# Altium PCB Pcb_4layer_8x4_Template_NoCenterHoles.PcbDoc
Units mil, origin at the board's own origin, x right, y up, seen from the top; angles counter-clockwise.
Board outline 8100 x 4000 mil, 4 copper layers (Top Layer, Middle 1 Layer, Middle 2 Layer, Bottom Layer), stack 51.864 mil thick; 97 components, 58 nets, 336 pads, 4 vias.
Unrouted connection lines stored in the file: 219.
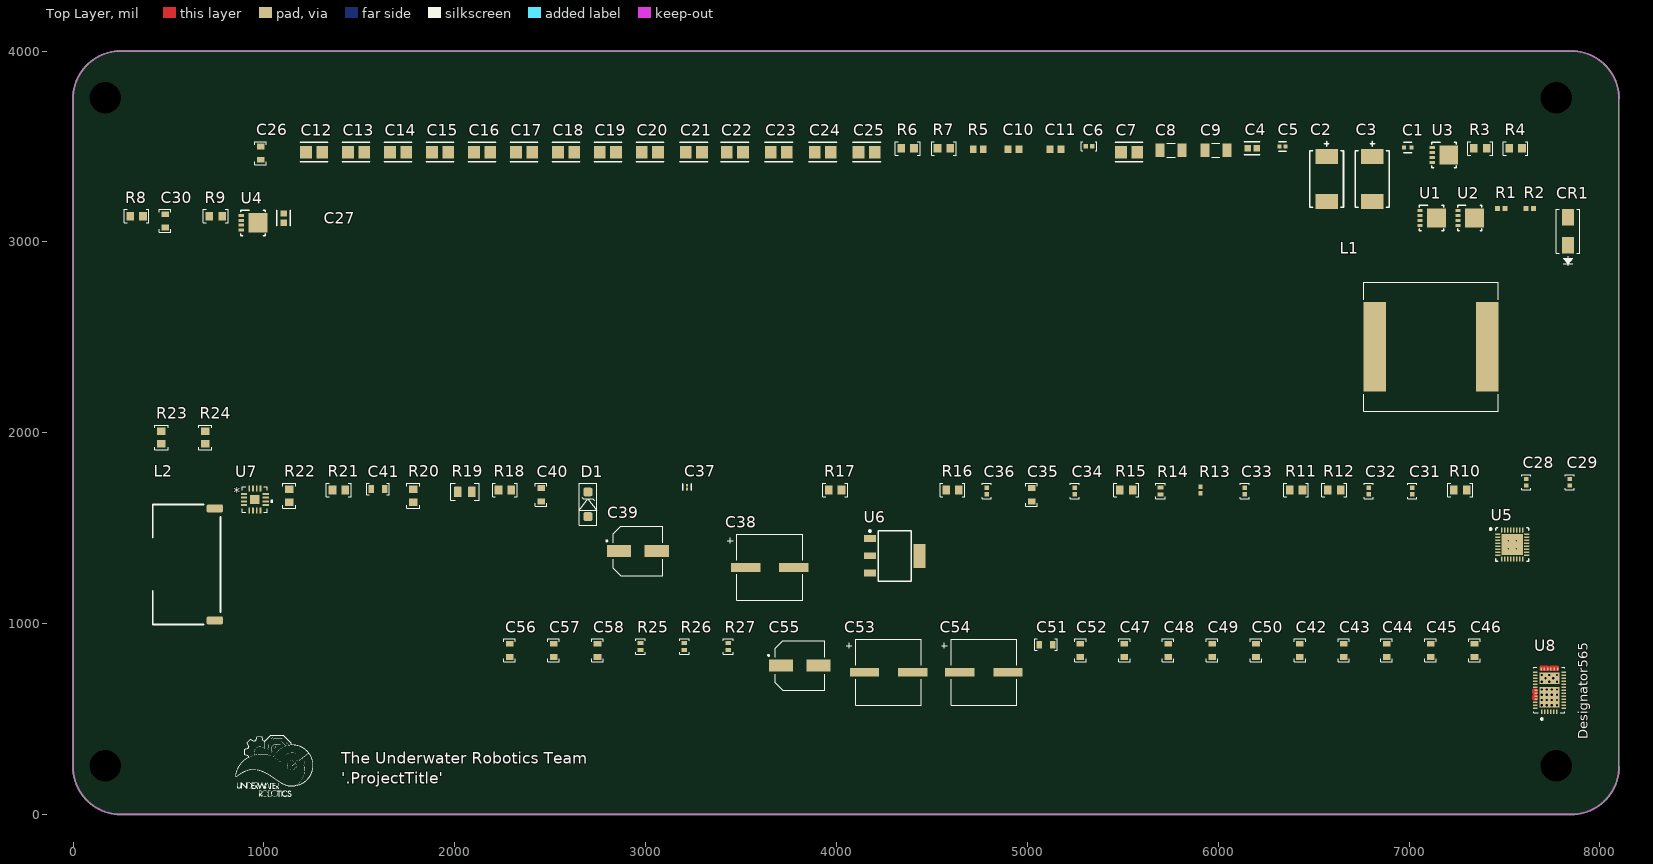
[diagram p0: Top Layer view]
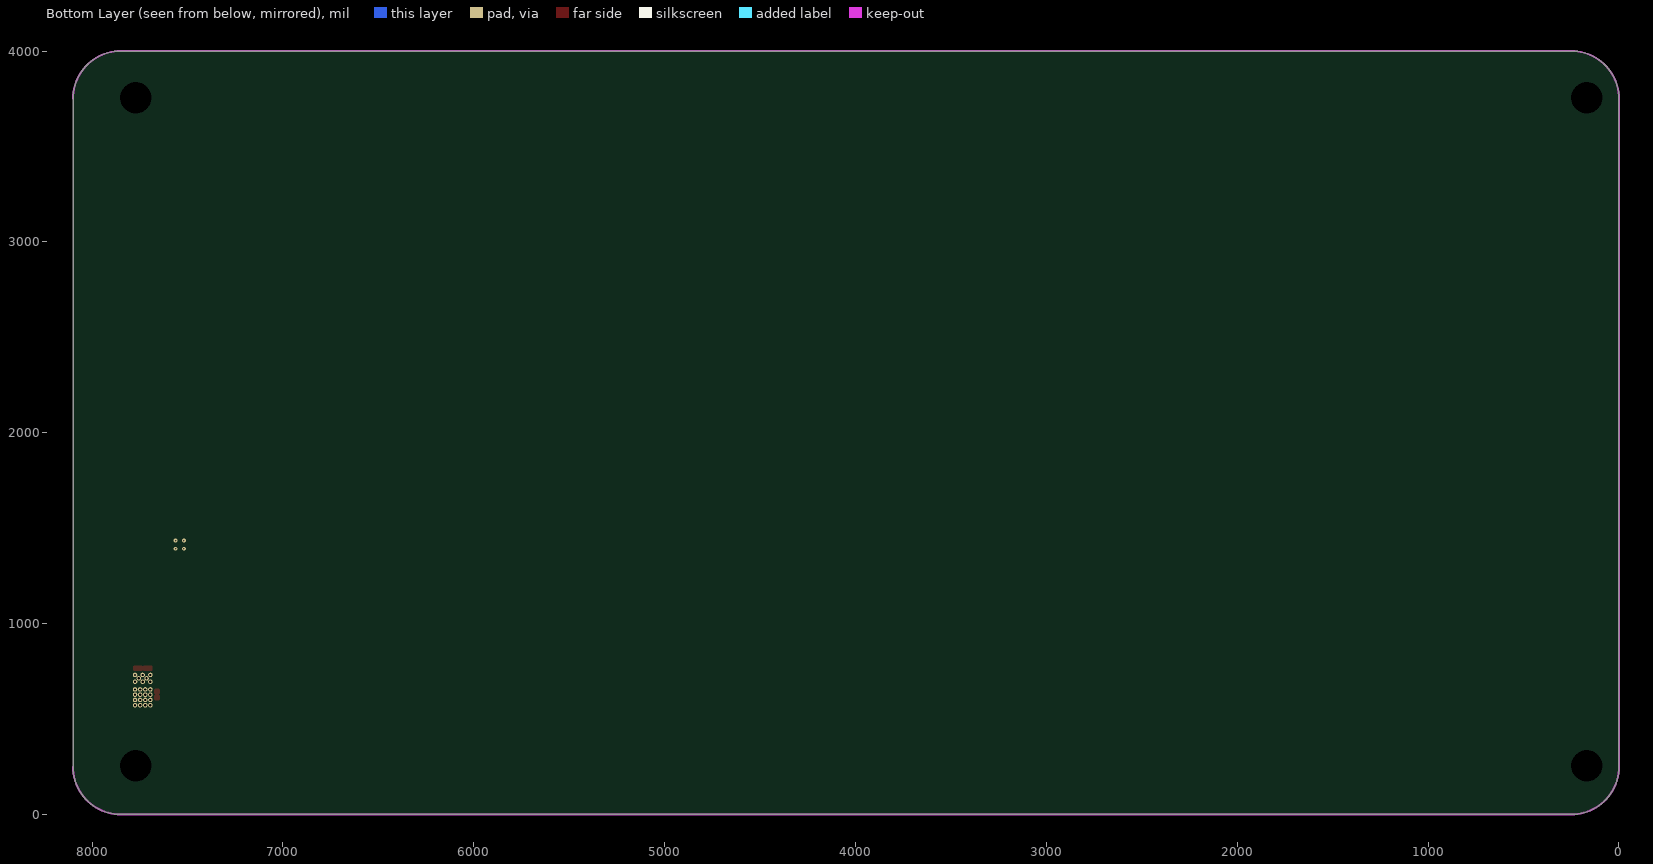
[diagram p1: Bottom Layer view, seen from below]

## Layer stack, top to bottom
Top Solder: solder mask 1, SM-001, Dk 4
Top Layer: signal copper 1.378
Dielectric 1: prepreg 5.1, PP-017, Dk 4.3
Dielectric 2: prepreg 5.1, PP-017, Dk 4.3
Middle 1 Layer: signal copper 0.354
Dielectric 3: core 28, Core-039, Dk 4.8
Middle 2 Layer: signal copper 0.354
Dielectric 4: prepreg 5.1, PP-017, Dk 4.3
Dielectric 5: prepreg 5.1, PP-017, Dk 4.3
Bottom Layer: signal copper 1.378
Bottom Solder: solder mask 1, SM-001, Dk 4

## Board outline
250,0 cw(c250,250) 0,250 0,3750 cw(c250,3750) 250,4000 7850,4000 cw(c7850,3750) 8100,3750 8100,250 cw(c7850,250) 7850,0

## Design rules (kind name [scope] priority, off if disabled: settings)
Clearance [All] p1: gap=10 ignorepadtopadclearanceinfootprint=FALSE except(0: Arc-Hole Track-Hole SMDPad-Hole THPad-Hole Via-Hole Fill-Hole Poly-Hole Region-Hole Text-Hole)
PolygonConnect [All] p1: connectstyle=Relief reliefconductorwidth=10 reliefentries=4 polygonreliefangle="90 Angle" airgapwidth=10
RoutingVias [All] p1: holewidth=28 width=50 viastyle="Through Hole" minholewidth=28 minwidth=50 maxholewidth=28 maxwidth=50
SolderMaskExpansion [All] p1: expansion=4 istentingtop=FALSE
Width [All] p1: maxlimit=10 minlimit=10 preferedwidth=10
30 further rules are at their usual default settings.

## Classes and differential pairs
component class SBH_Charger_Main: C1 C2 C3 C4 C5 C6 C7 C8 C9 C10 C11 C12 C13 C14 C15 C16 C17 C18 C19 C20 C21 C22 C23 C24 C25 C26 C27 C28 C29 C30 C31 C32 C33 C34 C35 C36 C37 C38 C39 C40 C41 CR1 D1 L1 L2 R1 R2 R3 R4 R5 R6 R7 R8 R9 R10 R11 R12 R13 R14 R15 R16 R17 R18 R19 R20 R21 R22 R23 R24 U1 U2 U3 U4 U5 U6 U7
component class Designator: C42 C43 C44 C45 C46 C47 C48 C49 C50 C51 C52 C53 C54 C55 C56 C57 C58 R25 R26 R27 U8

## Components (designator, comment, footprint, x,y, rotation, side; value= is the part's Value field where it differs from the comment)
C1 "10nF" FP-CC0402-MFG 6993,3495 r0 top value="10 nF"
C2 "22uF" FP-TAJD-MFG 6568,3330 r90 top
C3 "22uF" FP-TAJD-MFG 6808,3330 r90 top
C4 "1uF" FP-0603-L_1_6_0_15-W_0_8-IPC_C 6178,3490 r0 top
C5 "1nF" FP-C0402-BB-MFG 6338,3500 r0 top value="1,000 pF"
C6 "2.2uF Ceramic 35V" CAPACITOR_0402 5323,3500 r0 top value=2.2uF
C7 "10uF" FP-C3216-160-0_2-IPC_C 5533,3470 r0 top
C8 "10uF Ceramic 25V" CAPACITOR_1206 5753,3480 r0 top
C9 "10uF Ceramic 25V" CAPACITOR_1206 5988,3480 r0 top
C10 "47nF" CAPC1608X90X35ML10T15 4928,3485 r0 top
C11 "47nF" CAPC1608X90X35ML10T15 5148,3485 r0 top
C12 "10uF" FP-C3216-160-0_2-IPC_C 1263,3470 r0 top
C13 "10uF" FP-C3216-160-0_2-IPC_C 1483,3470 r0 top
C14 "10uF" FP-C3216-160-0_2-IPC_C 1703,3470 r0 top
C15 "10uF" FP-C3216-160-0_2-IPC_C 1923,3470 r0 top
C16 "10uF" FP-C3216-160-0_2-IPC_C 2143,3470 r0 top
C17 "10uF" FP-C3216-160-0_2-IPC_C 2363,3470 r0 top
C18 "10uF" FP-C3216-160-0_2-IPC_C 2583,3470 r0 top
C19 "10uF" FP-C3216-160-0_2-IPC_C 2803,3470 r0 top
C20 "10uF" FP-C3216-160-0_2-IPC_C 3023,3470 r0 top
C21 "10uF" FP-C3216-160-0_2-IPC_C 3253,3470 r0 top
C22 "10uF" FP-C3216-160-0_2-IPC_C 3468,3470 r0 top
C23 "10uF" FP-C3216-160-0_2-IPC_C 3698,3470 r0 top
C24 "10uF" FP-C3216-160-0_2-IPC_C 3928,3470 r0 top
C25 "10uF" FP-C3216-160-0_2-IPC_C 4158,3470 r0 top
C26 "100nF Ceramic 6.3V" CAPACITOR_0603 983,3465 r90 top value=0.1uF
C27 "1uF" FP-0603-L_1_6_0_15-W_0_8-IPC_C 1103,3125 r90 top
C28 "22nF Ceramic 25V" CAPACITOR_0402 7613,1740 r90 top value=22nF
C29 "22nF Ceramic 25V" CAPACITOR_0402 7843,1740 r90 top value=22nF
C30 "1uF Ceramic 16V" CAPACITOR_0603 483,3110 r90 top value=1uF
C31 "15pF Ceramic 50V" CAPACITOR_0402 7018,1695 r90 top value=15pF
C32 "1200pF Ceramic 50V" CAPACITOR_0402 6788,1695 r90 top value=1200pF
C33 "3.3nF Ceramic 50V" CAPACITOR_0402 6138,1695 r90 top value=3.3nF
C34 "33pF Ceramic 50V" CAPACITOR_0402 5248,1695 r90 top value=33pF
C35 "1uF Ceramic 16V" CAPACITOR_0603 5023,1675 r90 top value=1uF
C36 "2.2uF Ceramic 35V" CAPACITOR_0402 4788,1695 r90 top value=2.2uF
C37 "GRM033R6YA104ME14D" FP-GRM033-0_03-IPC_C 3218,1715 r90 top
C38 "22uF electrolytic 35 V" PCAP_8x5.4-ELECT_NCA 3650,1295 r0 top value=22uF
C39 "10uF electrolytic 63V" CAP_EEHZC1J100P 2960,1380 r0 top value=10uF
C40 "100pF Ceramic 50V" CAPACITOR_0603 2453,1675 r90 top value=100pF
C41 "100pF Ceramic 50V" CAPACITOR_0603 1598,1705 r0 top value=100pF
C42 "4.7uF Ceramic 6.3V" CAPACITOR_0603 6428,860 r90 top value=4.7uF
C43 "10nF Ceramic 6.3V" CAPACITOR_0603 6658,860 r90 top value=0.01uF
C44 "10nF Ceramic 6.3V" CAPACITOR_0603 6883,860 r90 top value=0.01uF
C45 "10nF Ceramic 6.3V" CAPACITOR_0603 7113,860 r90 top value=0.01uF
C46 "10nF Ceramic 6.3V" CAPACITOR_0603 7343,860 r90 top value=0.01uF
C47 "100uF Ceramic 6.3V" CAPACITOR_0603 5508,860 r90 top
C48 "100uF Ceramic 6.3V" CAPACITOR_0603 5738,860 r90 top
C49 "100uF Ceramic 6.3V" CAPACITOR_0603 5968,860 r90 top
C50 "10uF Ceramic 6.3V" CAPACITOR_0603 6198,860 r90 top
C51 "330pF Ceramic 16V" CAPACITOR_0603 5098,890 r0 top value=330pF
C52 "330pF Ceramic 16V" CAPACITOR_0603 5278,860 r90 top value=330pF
C53 "22uF electrolytic 35 V" PCAP_8x5.4-ELECT_NCA 4273,745 r0 top value=22uF
C54 "22uF electrolytic 35 V" PCAP_8x5.4-ELECT_NCA 4773,745 r0 top value=22uF
C55 "10uF electrolytic 63V" CAP_EEHZC1J100P 3808,780 r0 top value=10uF
C56 "10uF Ceramic 6.3V" CAPACITOR_0603 2288,860 r90 top
C57 "10uF Ceramic 6.3V" CAPACITOR_0603 2518,860 r90 top
C58 "10uF Ceramic 6.3V" CAPACITOR_0603 2748,860 r90 top
CR1 "SMAJP4KE18A-TP" DO-214AC 7833,3055 r90 top
D1 "Zener_Diode_36V_500mW" SOD-123 2698,1625 r90 top
L1 "SRP1770TA-3R3M" INDUCTOR_SRP1770TA-3R3M_BRN 7115,2450 r0 top
L2 "SPEAKER_SP_1609S" SPEAKER_SP-1609S 418,995 r0 top
R1 "2Ω" RESC1005X40X25ML05T05 7483,3175 r0 top
R2 "1Ω" RESC1005X40X25ML05T05 7633,3175 r0 top
R3 "0.005 OHM 1% 1W" RESISTOR_0603 7373,3490 r0 top
R4 "0.005 OHM 1% 1W" RESISTOR_0603 7558,3490 r0 top
R5 "2.2Ω" RESC1609X50X30ML10T20 4743,3485 r0 top
R6 "4.7 Ohm 5% 1/8W" RESISTOR_0603 4373,3490 r0 top
R7 "4.7 Ohm 5% 1/8W" RESISTOR_0603 4563,3490 r0 top
R8 "27 Ohm 5% 1/8W" RESISTOR_0603 333,3135 r0 top
R9 "27 Ohm 5% 1/8W" RESISTOR_0603 748,3135 r0 top
R10 "100k Ohm 5% 1/8W" RESISTOR_0603 7268,1700 r0 top
R11 "15k Ohm 5% 1/10W" RESISTOR_0603 6408,1700 r0 top
R12 "1k Ohm 5% 1/8W" RESISTOR_0603 6608,1700 r0 top
R13 "10 Ohm" RESC1005X40X25NL05T10 5908,1700 r90 top
R14 "16.9k Ohm 1% 1/16W" RESISTOR_0402 5698,1695 r90 top
R15 "470k Ohm 5% 1/10W" RESISTOR_0603 5518,1700 r0 top
R16 "270k Ohm 1% 1/10W" RESISTOR_0603 4608,1700 r0 top
R17 "100k Ohm 5% 1/8W" RESISTOR_0603 3993,1700 r0 top
R18 "100k Ohm 5% 1/8W" RESISTOR_0603 2263,1700 r0 top
R19 "33k Ohm 5% 1/8W" RESISTOR_0805 2053,1690 r0 top
R20 "169K OHM 1% 1/3W" RESISTOR_0603 1783,1670 r90 top
R21 "10k Ohm 5% 1/10W" RESISTOR_0603 1393,1700 r0 top
R22 "10k Ohm 5% 1/10W" RESISTOR_0603 1133,1670 r90 top
R23 "10k Ohm 5% 1/10W" RESISTOR_0603 463,1975 r90 top
R24 "10k Ohm 5% 1/10W" RESISTOR_0603 693,1975 r90 top
R25 "2.2k Ohm 1% 1/16W" RESISTOR_0402 2973,880 r90 top
R26 "2.2k Ohm 1% 1/16W" RESISTOR_0402 3203,880 r90 top
R27 "10k Ohm 1% 1/16W" RESISTOR_0402 3433,880 r90 top
U1 "G30N03D3" DNH0008A_NV 7118,3125 r0 top
U2 "G30N03D3" DNH0008A_NV 7318,3125 r0 top
U3 "G30N03D3" DNH0008A_NV 7183,3455 r0 top
U4 "G30N03D3" DNH0008A_NV 943,3100 r0 top
U5 "BQ25731" S-PWQFN-N32 7540.79,1413.62 r0 top
U6 "TLE42744GS V33" INF-PG-SOT223_SC-73_N 4305,1355 r0 top
U7 "MAX98357AETE+T" TQFN-16 953,1650 r0 top
U8 "TPS25750DRJKR" "38-WQFN (4x6)" 7734.84,651.65 r90 top

## Footprints (in the part's own frame and the unit in brackets; to place one, negate y for a bottom-side part, rotate by r counter-clockwise, add the part's x,y. Pads: shape width x height; smd on the part's side, far side on the other; paste and mask are expansions set on the pad)
"38-WQFN (4x6)" [mm] "TPS25750DRJKR"
  rect 0.6x0.2 smd paste+0 mask-0.292: 1(-2.9,1) 2(-2.9,0.6) 3(-2.9,0.2) 4(-2.9,-0.2) 5(-2.9,-0.6) 6(-2.9,-1)
  rect 0.2x0.6 smd paste+0 mask-0.292: 7(-2.4,-1.9) 8(-2,-1.9) 9(-1.6,-1.9) 10(-1.2,-1.9) 11(-0.8,-1.9) 12(-0.4,-1.9) 13(0,-1.9) 14(0.4,-1.9) 15(0.8,-1.9) 16(1.2,-1.9) 17(1.6,-1.9) 18(2,-1.9) 19(2.4,-1.9) 26(2.4,1.9) 27(2,1.9) 28(1.6,1.9) 29(1.2,1.9) 30(0.8,1.9) 31(0.4,1.9) 36(-1.6,1.9) 37(-2,1.9) 38(-2.4,1.9)
  rect 0.4x0.2 smd paste-0.187 mask-0.191: 20(2.8,-1.1) 21(2.8,-0.65) 22(2.8,-0.2) 23(2.8,0.2) 24(2.8,0.65) 25(2.8,1.1)
  rect 0.2x0.4 smd paste-0.187 mask-0.191: 32(0,1.8) 33(-0.4,1.8) 34(-0.8,1.8) 35(-1.2,1.8)
  rect 2.72x2.65 smd paste-1.347 mask-1.346: 39(-0.965,0)
  rect 1.53x2.65 smd paste-1.312 mask-1.308: 40(1.56,0)
  round 0.6 / inner round 1.524 / far side round 0.6 hole 0.305 paste-0.3 mask+0: 41(-2.015,1.02) 42(-1.315,1.02) 43(-0.615,1.02) 44(0.085,1.02) 45(-2.015,0.34) 46(-1.315,0.34) 47(-0.615,0.34) 48(0.085,0.34) 49(-2.015,-0.34) 50(-1.315,-0.34) 51(-0.615,-0.34) 52(0.085,-0.34) 53(-2.015,-1.02) 54(-1.315,-1.02) 55(-0.615,-1.02) 56(0.085,-1.02) 57(1.56,0.51) 58(1.56,-0.51) 59(2.01,0) 60(1.11,0) 61(1.11,1.02) 62(2.01,1.02) 63(1.11,-1.02) 64(2.01,-1.02)
  Top Layer region: 2.55,-1.15 2.55,-0.097 2.65,0.003 3.15,0.003 3.25,-0.097 3.25,-1.15 3.15,-1.25 2.65,-1.25
  Top Layer region: 2.55,0.15 2.55,1.203 2.65,1.303 3.15,1.303 3.25,1.203 3.25,0.15 3.15,0.05 2.65,0.05
  Top Layer region: 2.55,0.15 2.55,1.203 2.65,1.303 3.15,1.303 3.25,1.203 3.25,0.15 3.15,0.05 2.65,0.05
  Top Layer region: -0.55,1.65 -0.55,2.15 -0.45,2.25 0.05,2.25 0.15,2.15 0.15,1.65 0.05,1.55 -0.45,1.55
  Top Layer region: -1.35,1.65 -1.35,2.15 -1.25,2.25 -0.75,2.25 -0.65,2.15 -0.65,1.65 -0.75,1.55 -1.25,1.55
  silkscreen extent -3.97,-2.05 3.05,2.05
CAP_EEHZC1J100P [mm]
  rect 3.2x1.6 smd: 1(-2.5,0) 2(2.5,0)
  silkscreen extent -4.25,-3.3 3.3,3.3, body extent -3.65,-3.3 3.65,3.3, height 5.8
CAPACITOR_0402 [mm]
  rect 0.56x0.6 smd: 1(-0.435,0) 2(0.435,0)
  silkscreen extent -1.02,-0.6 1.02,0.6, body extent -0.5,-0.28 0.5,0.27, height 0.51
CAPACITOR_0603 [mil] "CAPACITOR 0603"
  rect 30x40 smd: 1(-35,0) 2(35,0)
  silkscreen extent -60,-30 60,30, body extent -31,-16 32,16, height 31
CAPACITOR_1206 [mm]
  rect 1.2x1.82 smd: 1(-1.46,0) 2(1.46,0)
  silkscreen extent -0.54,-0.9 0.54,0.9, body extent -1.6,-0.9 1.6,0.9, height 1.61
CAPC1608X90X35ML10T15 [mm] "Chip Capacitor, 2-Leads, Body 1.60x0.80mm, IPC Low Density"
  rect 0.95x1.05 smd: 1(-0.725,0) 2(0.725,0)
  body extent -0.85,-0.45 0.85,0.45, height 0.9
DNH0008A_NV [mm]
  rect 0.7x0.4 smd paste-0.05 mask-0.051: 1(-1.55,0.975) 2(-1.55,0.325) 3(-1.55,-0.325) 4(-1.55,-0.975) 5(1.55,-0.975) 6(1.55,-0.325) 7(1.55,0.325) 8(1.55,0.975)
  rect 2.51x2.55 smd paste-1.262 mask-1.257: 9(0.645,0)
  silkscreen extent -1.62,-1.7 1.62,1.7, body extent 0,0 0.25,0.25, height 0.25
DO-214AC [mil]
  rect 86x64 smd paste+0 mask+0: 1(-73,0) 2(73,0)
  silkscreen extent -180,-63 115,63, body extent -110,-57 110,57, height 98
FP-0603-L_1_6_0_15-W_0_8-IPC_C [mil]
  rect 33.77x33.94 smd paste+0 mask+0: 1(-23.71,0) 2(23.71,0)
  silkscreen extent -41,-34 41,34, body extent -45,-23 45,23, height 10
FP-C0402-BB-MFG [mm]
  rect 0.52x0.52 smd paste+0 mask+0: 1(-0.4,0) 2(0.4,0)
  silkscreen extent -0.5,-0.64 0.5,0.64, body extent -0.8,-0.4 0.8,0.4, height 0.25
FP-C3216-160-0_2-IPC_C [mil]
  rect 61.18x67.17 smd paste+0 mask+0: 1(-42.37,0) 2(42.37,0)
  silkscreen extent -73,-51 73,51, body extent -77,-39 77,39, height 10
FP-CC0402-MFG [mm]
  rect 0.5x0.5 smd paste+0 mask+0: 1(-0.5,0) 2(0.5,0)
  silkscreen extent -0.53,-0.68 0.53,0.67, body extent -0.87,-0.48 0.87,0.48, height 0.25
FP-GRM033-0_03-IPC_C [mil]
  rect 13.94x10.34 smd paste+0 mask+0: 1(-10.01,0) 2(10.01,0)
  silkscreen extent -17,-22 17,22, body extent -21,-10 21,10, height 10
FP-TAJD-MFG [mm]
  rect 2x3 smd paste+0 mask+0: 1(-3,0) 2(3,0)
  silkscreen extent -3.75,-2.25 4.97,2.25, body extent -4.1,-2.35 4.1,2.35, height 0.25
INDUCTOR_SRP1770TA-3R3M_BRN [mil]
  rect 117x469 smd paste+0 mask+0: 1(-293.96,0) 2(293.96,0)
  silkscreen extent -351,-338 351,338, body extent -346,-333 346,333, height 266
INF-PG-SOT223_SC-73_N [mm] "SOT223, 4-Leads, Body 6.5x3.5mm, Pitch 2.3mm, IPC Medium Density"
  rect 1.6x0.9 smd: 1(-3.3,2.3) 2(-3.3,0) 3(-3.3,-2.3)
  rect 1.6x3.2 smd: 4(3.3,0)
  silkscreen extent -3.42,-3.35 2.2,3.42, body extent -1.85,-3.35 1.85,3.35, height 1.8
PCAP_8x5.4-ELECT_NCA [mil]
  rect 154x47 smd paste+0 mask+0: 1(-126,0) 2(126,0)
  silkscreen extent -222,-172 172,172, body extent -183,-167 183,160, height 219
RESC1005X40X25ML05T05 [mm] "Chip Resistor, 2-Leads, Body 1.00x0.50mm, IPC Low Density"
  rect 0.65x0.65 smd: 1(-0.5,0) 2(0.5,0)
  body extent -0.53,-0.27 0.53,0.28, height 0.4
RESC1005X40X25NL05T10 [mm] "Chip Resistor, 2-Leads, Body 1.00x0.50mm, IPC Medium Density"
  rect 0.6x0.55 smd: 1(-0.425,0) 2(0.425,0)
  body extent -0.53,-0.27 0.53,0.28, height 0.4
RESC1609X50X30ML10T20 [mm] "Chip Resistor, 2-Leads, Body 1.55x0.85mm, IPC Low Density"
  rect 0.9x1.05 smd: 1(-0.675,0) 2(0.675,0)
  body extent -0.82,-0.48 0.82,0.48, height 0.5
RESISTOR_0402 [mm] "Resistor 0402"
  rect 0.55x0.75 smd: 1(-0.475,0) 2(0.475,0)
  silkscreen extent -1.02,-0.64 1.02,0.64, body extent -0.5,-0.25 0.5,0.25, height 0.25
RESISTOR_0603 [mil] "Resistor 0603"
  rect 40x45 smd: 1(-33.5,0) 2(33.5,0)
  silkscreen extent -65,-35 65,35, body extent -31,-16 32,16, height 16
RESISTOR_0805 [mm]
  rrect25% 1x1.42 smd: 1(-0.935,0) 2(0.935,0)
  silkscreen extent -1.91,-1.14 1.91,1.14, body extent -1.11,-0.67 1.1,0.67, height 0.61
S-PWQFN-N32 [mm] "QFN, 32-Leads, Body 4.00x4.00mm, Pitch 0.40mm, Thermal Pad 2.80x2.80mm, IPC High Density"
  oval 0.7x0.2 smd: 1(-1.925,1.4) 2(-1.925,1) 3(-1.925,0.6) 4(-1.925,0.2) 5(-1.925,-0.2) 6(-1.925,-0.6) 7(-1.925,-1) 8(-1.925,-1.4) 17(1.925,-1.4) 18(1.925,-1) 19(1.925,-0.6) 20(1.925,-0.2) 21(1.925,0.2) 22(1.925,0.6) 23(1.925,1) 24(1.925,1.4)
  oval 0.2x0.7 smd: 9(-1.4,-1.925) 10(-1,-1.925) 11(-0.6,-1.925) 12(-0.2,-1.925) 13(0.2,-1.925) 14(0.6,-1.925) 15(1,-1.925) 16(1.4,-1.925) 25(1.4,1.925) 26(1,1.925) 27(0.6,1.925) 28(0.2,1.925) 29(-0.2,1.925) 30(-0.6,1.925) 31(-1,1.925) 32(-1.4,1.925)
  rect 2.8x2.8 smd: 33(0,0)
  silkscreen extent -3,-2.22 2.22,2.22, body extent -2,-2 2,2, height 0.8
SOD-123 [mm] "Schottky Diode SOD-123"
  rrect50% 1.2x1.22 smd: 1(-1.635,0) 2(1.635,0)
  silkscreen extent -2.79,-1.14 2.79,1.14, body extent -1.95,-0.9 1.95,0.9, height 1.18
SPEAKER_SP-1609S [mm]
  rrect50% 2.2x1.1 smd: 1(8.255,15.45) 2(8.255,0.55)
  silkscreen extent 0,0 9.02,16, body extent 0,0 9,18.9
TQFN-16 [mil] "L"
  rect 32x10 smd paste+0 mask+0: 1(-57,29.53) 2(-57,9.84) 3(-57,-9.84) 4(-57,-29.53) 9(57,-29.53) 10(57,-9.84) 11(57,9.84) 12(57,29.53)
  rect 10x32 smd paste+0 mask+0: 5(-29.53,-57) 6(-9.84,-57) 7(9.84,-57) 8(29.53,-57) 13(29.53,57) 14(9.84,57) 15(-9.84,57) 16(-29.53,57)
  rect 49x49 smd paste+0 mask+0: 17(0,0)
  silkscreen extent -66,-66 93,66, body extent -61,-61 61,61, height 32

## Part data
C1: library part CMP-2100-03592-2, "CAP CER 10000PF 50V X7R 0402", Capacitance="10 nF", Manufacturer=YAGEO, Manufacturer Part Number=CC0402KRX7R9BB103, Package=CC0402, Temperature="-55°C to +125°C", Temperature Characteristic=X7R, Temperature Coefficient=30ppm/°C, Temperature Range High=+125°C, Temperature Range Low=-55°C, Tolerance=0.1, Voltage Rating="50 V", Automotive=No, Automotive Grade=NA, Category=Cap, ComponentLink2Description=Datasheet, ComponentLink2URL=http://www.yageo.com/documents/recent/UPY-GP_NP0_16V-to-50V_16.pdf, Device Class L1="Passive Components", Device Class L2=Capacitors, Device Class L3="Ceramic Capacitors", Digikey Description="CAP CER 10000PF 50V X7R 0402", Footprint Url=http://www.yageo.com/exep/pages/download/literatures/UPY-C_GEN_24.pdf, Height=0.55mm, Ipc Land Pattern Name=CAPC10050X50, Lead Free=Yes, Material=Ceramic, Mouser Description="0402 10 nF 50 V ±10 % Tolerance X7R SMT Multilayer Ceramic Capacitor", Octopart=https://octopart.com/cc0402krx7r9bb103-yageo-8376513, RoHS=TRUE
C2 C3: library part CMP-04424-000506-1, "22uF 35V  ±10% 900mΩ 2917  SMD Tantalum Capacitor", Case Code (Imperial)=2917, Case Code (Metric)=7343, Dielectric Material=Tantalum, ESR (Equivalent Series Resistance)=900mR, Leakage Current=7.7uA, Max Operating Temperature=125°C, Min Operating Temperature=-55°C, Package Quantity=1, Tolerance=10%, Voltage=35V, Capacitance=22uF, Case/Package=2917, Construction=Flat, Depth=4.3mm, Dissipation Factor=6%, Features="General Purpose", Height=2.9mm, Height - Seated (Max)=0.122inch, Lead Free="Lead Free", Length=7.3mm, Mount="Surface Mount", Number of Pins=2, Packaging="Tape and Reel", Polarity=Polar, Radiation Hardening=No, REACH SVHC="No SVHC", RoHS Compliant=Yes, Series=TAJ, Termination=SMD/SMT, Voltage Rating=35V, Voltage Rating (DC)=35V, Width=4.3mm
C4 C27: library part CMP-2000-07531-4, "Ceramic Capacitor General Use 1uF ±10% 50V X7R 0603", Case Code (Imperial)=0603, Case Code (Metric)=1608, Dielectric=X7R, Max Operating Temperature=125°C, Min Operating Temperature=-55°C, Package Quantity=1, Tolerance=10%, Voltage Rating=50V, Capacitance=1uF, Case/Package=0603, Construction=Flat, Depth=0.8mm, Halogen Free="Halogen Free", Height=0.8mm, Length=1.6mm, Mount="Surface Mount", Packaging="Tape and Reel", Radiation Hardening=No, RoHS Compliant=Yes, Series=M, Termination=SMD/SMT, Thickness=0.037inch, Voltage Rating (DC)=50V, Width=0.031inch
C5: library part CMP-2008-03295-2, "CAP CER 1000PF 50V 5% NP0 0402", Capacitance="1,000 pF", Manufacturer=Kemet, Manufacturer Part Number=C0402C102J5GACTU, Package=C0402-BB, Temperature="-55°C to +125°C", Temperature Characteristic=C0G, Temperature Coefficient=15%, Temperature Range High=+125°C, Temperature Range Low=-55°C, Tolerance=0.05, Voltage Rating="50 V", Automotive=No, Category=Cap, ComponentLink2Description=Datasheet, ComponentLink2URL=https://content.kemet.com/datasheets/KEM_C1002_X7R_SMD.pdf, Device Class L1="Passive Components", Device Class L2=Capacitors, Device Class L3="Ceramic Capacitors", Digikey Description="CAP CER 1000PF 50V 5% NP0 0402", Height=0.55mm, Ipc Land Pattern Name=CAPC10050X50, Lead Free=Yes, Material=Ceramic, Mouser Description="Cap Ceramic 0.001uF 50V C0G 5% SMD 0402 125°C Paper T/R", Octopart=https://octopart.com/c0402c102j5gactu-kemet-9145103, RoHS=TRUE
C6 C36: library part CAPACITOR_2.2uF_0402, "Cap 2.2uF 35V +/-10% / Ceramic 0402", Supplier Part Number 1=445-9028-1-ND, Tolerance="+/- 10%", Voltage=35V, Made By="Flip B", Supplier 1=Digi-Key
C7 C12 C13 C14 C15 C16 C17 C18 C19 C20 C21 C22 C23 C24 C25: library part CMP-2000-06048-2, "Multilayer Ceramic Capacitors 10uF ±20% 35V X7R SMD 1206", Case Code (Imperial)=1206, Case Code (Metric)=3216, Dielectric=X7R, Dielectric Material=Ceramic, Max Operating Temperature=125°C, Min Operating Temperature=-55°C, Package Quantity=2000, Tolerance=20%, Voltage Rating=35V, Capacitance=10uF, Case/Package=1206, Construction=Flat, Depth=1.6mm, Height=1.6mm, Lead Free="Lead Free", Length=3.2mm, Mount="Surface Mount", Packaging="Tape and Reel", REACH SVHC="No SVHC", Resistor Type=Ceramic, RoHS Compliant=Yes, Series=C, Termination=SMD/SMT, Thickness=0.071inch, Voltage Rating (DC)=35V, Weight=0.000571oz, Width=0.063inch
C8 C9: library part CAPACITOR_10uF_1206, "Cap 10uF 25V +/-10% / Ceramic 1206", Supplier Part Number 1=1276-1804-6-ND, Tolerance="+/- 10%", Value (uF)="10 uF", Voltage=25V, Made By="Robert Pafford", Supplier 1=Digi-Key
C10 C11: library part CMP-2006-02927-1, Manufacturer=Murata, Part Number=GRM188R71H473KA61D
C26: library part CAPACITOR_0.1uF_0603_1, "Cap 100nF 6.3V +/-10% / Ceramic 0603", Supplier Part Number 1=399-15351-1-ND, Tolerance="+/- 10%", Voltage=6.3V, ComponentLink1Description=Datsheet, ComponentLink1URL=https://www.mouser.com/datasheet/2/212/KEM_C1002_X7R_SMD-1102033.pdf, Made By="Flip B", Supplier 1=Digi-Key
C28 C29: library part CAPACITOR_0.022uF_0402, "Cap 22nF 25V +/-10% / Ceramic 0402", Supplier Part Number 1=445-1261-1-ND, Tolerance="+/- 10%", Voltage=25V, Made By="Robert Pafford", Supplier 1=Digi-Key
C30 C35: library part CAPACITOR_1uF_0603, "Cap 1uF 16V +/-10% / Ceramic 0603", Supplier Part Number 1=399-7847-1-ND, Tolerance="+/- 10%", Voltage=16V, Made By="Flip B", Supplier 1=Digi-Key
C31: library part CAPACITOR_0.000015uF_0402, "CAP CER 15PF 50V C0G/NP0 0402", Supplier Part Number 1=82AC9245, Tolerance="+/- 5%", Voltage=50V, Made By="Robert Pafford", Supplier 1=Newark
C32: library part CAPACITOR_0.0012uF_0402, "CAP CER 1200PF 50V X7R 0402", Supplier Part Number 1=5334081, Tolerance="+/- 5%", Voltage=50V, Made By="Robert Pafford", Supplier 1="Future Electronics"
C33: library part CAPACITOR_0.0033uF_0402, "CAP CER 3300PF 50V X7R 0402", Supplier Part Number 1=CL05B332KB5NNNC, Tolerance="+/- 5%", Voltage=50V, Made By="Robert Pafford", Supplier 1="Arrow Electronics"
C34: library part CAPACITOR_0.000033uF_0402, "CAP CER 33PF 50V C0G/NP0 0402", Supplier Part Number 1=82AC9259, Tolerance="+/- 5%", Voltage=50V, Made By="Robert Pafford", Supplier 1=Newark
C37: library part CAPACITOR_0.1uF_0603, "Chip Multilayer Ceramic Capacitors for General Purpose, 0201, 0.10uF, X5R, 15%, 20%, 35V", Capacitance=100nF, Case Code (Imperial)=0201, Case Code (Metric)=0603, Dielectric=X5R, Max Operating Temperature=85°C, Min Operating Temperature=-55°C, Package Quantity=15000, Tolerance=20%, Voltage Rating=35V, Case/Package=0201, Height=0.3mm, Length=0.024inch, Mount="Surface Mount", Packaging="Tape and Reel", Termination=SMD/SMT, Thickness=0.013inch, Voltage Rating (DC)=35V, Weight=1.2E-05oz, Width=0.012inch
C38 C53 C54: library part "CAP ALUM 22UF 20% 35V SMD", "22 µF 35 V Aluminum Electrolytic Capacitors Radial, Can - SMD 1000 Hrs", Supplier Part Number 1=PCE3952DKR-ND, Voltage=35V, Made By="Robert Pafford", Supplier 1=Digi-Key
C39 C55: library part "CAP ALUM 10UF 20% 63V SMD", "10 µF 63 V Aluminum - Polymer Capacitors Radial, Can SMD 120mOhm", Max Voltage=63V, Supplier Part Number 1=P15466CT-ND, Tolerance="+/- 20%", Made By="Robert Pafford", Supplier 1=Digi-Key
C40 C41: library part CAPACITOR_0.0001uF_0603, "CAP CER 100PF 50V C0G/NP0 0603", Supplier Part Number 1=CL10C101JB8NNNC, Tolerance="+/- 5%", Voltage=50V, Made By="Robert Pafford", Supplier 1="Arrow Electronics"
C42: library part CAPACITOR_4.7uF_0603, "Cap 4.7uF 6.3V +/-10% / Ceramic 0603", Supplier Part Number 1=1276-2087-1-ND, Tolerance="+/- 10%", Voltage=6.3V, Made By="Robert Pafford", Supplier 1=Digi-Key
C43 C44 C45 C46: library part CAPACITOR_0.01uF_0603, "Cap 10nF 6.3V +/-20% / Ceramic 0603", Supplier Part Number 1=80-C0603C103K9R, Tolerance="+/- 10%", Voltage=6.3V, ComponentLink1Description=Datsheet, ComponentLink1URL=https://www.mouser.com/datasheet/2/212/KEM_C1002_X7R_SMD-1102033.pdf, Made By="Flip B", Supplier 1=Mouser
C47 C48 C49: library part CAPACITOR_100uF_0603, "Cap 100uF 6.3V +/-20% / Ceramic 0603", Supplier Part Number 1=6911206, Tolerance="+/- 20%", Value (uF)="100 uF", Voltage=6.3V, ComponentLink1Description=Digikey, ComponentLink1URL=https://www.digikey.com/en/products/detail/samsung-electro-mechanics/CL10A106MQ8NNNC/3886777, Made By="Dylan Trainor", Supplier 1=RSComponents
C50 C56 C57 C58: library part CAPACITOR_10uF_0603, "Cap 10uF 6.3V +/-20% / Ceramic 0603", Supplier Part Number 1=1276-1119-1-ND, Tolerance="+/- 20%", Value (uF)="10 uF", Voltage=6.3V, ComponentLink1Description=Digikey, ComponentLink1URL=https://www.digikey.com/en/products/detail/samsung-electro-mechanics/CL10A106MQ8NNNC/3886777, Made By="Flip B", Supplier 1=Digi-Key
C51 C52: library part CAPACITOR_0.00033uF_0603, "Cap 330pF 16V +/-5% / Ceramic 0603", Supplier Part Number 1=732-7769-1-ND, Tolerance="+/- 5%", Voltage=16V, ComponentLink1Description=Datsheet, ComponentLink1URL=https://www.we-online.de/katalog/datasheet/885012006026.pdf, Made By="Flip B", Supplier 1=Digi-Key
CR1: library part TVS_Diode_25.5V_16.1A, "TVS DIODE 15.3VWM 25.5VC DO214AC", Mfr_Name=MCC, Copyright="Copyright (C) 2023 Ultra Librarian. All rights reserved.", Manufacturer_Part_Number=SMAJP4KE18A-TP, RefDes=RefDes, Supplier 1="Arrow Electronics", Supplier Part Number 1=SMAJP4KE18A-TP, Type=DEV
D1: "Zener Diode 36 V 500 mW ±5% Surface Mount SOD-123", Package=SOD-123, Power=500mW, Supplier Part Number 1=MMSZ4715-TPMSCT-ND, Voltage - Zener=16V, Made By="Flip B", Supplier 1=Digi-Key
L1: library part INDUCTOR_3.3uH_SRP1770TA_3R3M, "3.3 µH Shielded Drum Core, Wirewound Inductor 28 A 3.9mOhm Max Nonstandard", Manufacturer_Part_Number=SRP1265C-4R7M, Mfr_Name="Bourns Electronics", Supplier Part Number 1=58Y3764, Copyright="Copyright (C) 2023 Ultra Librarian. All rights reserved.", RefDes=RefDes, Supplier 1=Newark, Type=DEV
L2: "8 Ohms General Purpose Speaker 700 mW 200 Hz ~ 5 kHz Top Rectangular", Supplier Part Number 1=433-1132-ND, Supplier 1=Digi-Key
R1: library part CMP-2002-08486-1, Manufacturer="Vishay Dale", Part Number=CRCW04022R00FKED
R2: library part CMP-2002-08342-1, Manufacturer="Vishay Dale", Part Number=CRCW04021R00FKED
R3 R4: library part RESISTOR_5m_1%_1206, "5 mOhms ±1% 1W Chip Resistor 1206 (3216 Metric) Anti-Sulfur, Current Sense, Flame Retardant Coating, Moisture Resistant, Safety Metal Foil", Digikey Part Numer=CR0603-JW-104ELFTR-ND, Supplier Part Number 1=4463-D1WEL1206MR005F-T5CT-ND, Tolerance="+/- 1%", Value  (Ohms)=5mOhms, ComponentLink1Description=Datasheet, ComponentLink1URL=https://www.bourns.com/docs/product-datasheets/CRxxxxx.pdf, Made By="Andrew Lin", Supplier=Digikey, Supplier 1=Digi-Key, Wattage=1W
R5: library part CMP-2000-03206-1, Manufacturer="Vishay Dale", Part Number=CRCW06032R20FKEA
R6 R7: library part RESISTOR_4.7_0603, "RES 4.7 OHM 5% 1/8W 0603", Digikey Part Numer=CR0603-JW-104ELFTR-ND, Supplier Part Number 1=2019-RK73B1JTTD4R7JCT-ND, Tolerance="+/- 5%", Value  (Ohms)=4.7, Made By="Robert Pafford", Supplier=Digikey, Supplier 1=Digi-Key, Wattage=1/8W
R8 R9: library part RESISTOR_27_0603, "RES 27 OHM 5% 1/8W 0603", Digikey Part Numer=CR0603-JW-104ELFTR-ND, Supplier Part Number 1=2019-RK73B1JTTD270JCT-ND, Tolerance="+/- 5%", Value  (Ohms)=27, ComponentLink1Description=Datasheet, ComponentLink1URL=https://www.bourns.com/docs/product-datasheets/CRxxxxx.pdf, Made By="Robert Pafford", Supplier=Digikey, Supplier 1=Digi-Key, Wattage=1/8W
R10 R17 R18: library part RESISTOR_100K_0603, "RES 100k OHM 5% 1/10W 0603", Digikey Part Numer=CR0603-JW-104ELFTR-ND, Supplier Part Number 1=CR0603-JW-104ELFCT-ND, Tolerance="+/- 5%", Value  (Ohms)=100K, ComponentLink1Description=Datasheet, ComponentLink1URL=https://www.bourns.com/docs/product-datasheets/CRxxxxx.pdf, Made By="Flip B", Supplier=Digikey, Supplier 1=Digi-Key, Wattage=1/10W
R11: library part RESISTOR_15K_0603, "RES 15k OHM 5% 1/10W 0603", Digikey Part Numer=CR0603-JW-104ELFTR-ND, Supplier Part Number 1=RMCF0603JG15K0, Tolerance="+/- 5%", Value  (Ohms)=15K, ComponentLink1Description=Datasheet, ComponentLink1URL=https://www.bourns.com/docs/product-datasheets/CRxxxxx.pdf, Made By="Dylan Trainor", Supplier=Digikey, Supplier 1=Avnet, Wattage=1/8W
R12: library part RESISTOR_1K_0603, "RES 1k OHM 5% 1/8W 0603", Digikey Part Numer=CR0603-JW-104ELFTR-ND, Supplier Part Number 1=2019-RK73B1JTTD102JCT-ND, Tolerance="+/- 5%", Value  (Ohms)=1K, ComponentLink1Description=Datasheet, ComponentLink1URL=https://www.bourns.com/docs/product-datasheets/CRxxxxx.pdf, Made By="Robert Pafford", Supplier=Digikey, Supplier 1=Digi-Key, Wattage=1/8W
R13: library part CMP-2002-03046-1, Manufacturer="Vishay Dale", Part Number=CRCW040210R0FKEDHP
R14: library part RESISTOR_16.9K_0402, "16.9 kOhms ±1% 0.063W, 1/16W Chip Resistor 0402 (1005 Metric) Moisture Resistant Thick Film", Supplier Part Number 1=5791231, Tolerance="+/- 1%", Value  (Ohms)=16.9k, Made By="Andrew Lin", Supplier 1="Future Electronics", Wattage=1/16W
R15: library part RESISTOR_470K_0603, "RES 470k OHM 5% 1/10W 0603", Supplier Part Number 1=RMCF0603JT470KCT-ND, Tolerance="+/- 5%", Value  (Ohms)=470K, ComponentLink1Description=Datasheet, ComponentLink1URL=https://www.bourns.com/docs/product-datasheets/CRxxxxx.pdf, Made By="Robert P", Supplier 1=Digi-Key, Wattage=1/10W
R16: library part RESISTOR_270K_1%_0603, "RES 270k OHM 1% 1/10W 0603", Digikey Part Numer=CR0603-JW-104ELFTR-ND, Supplier Part Number 1=71-CRCW0603-270K-E3, Tolerance="+/- 1%", Value  (Ohms)=270K, ComponentLink1Description=Datasheet, ComponentLink1URL=https://www.bourns.com/docs/product-datasheets/CRxxxxx.pdf, Made By="Andrew Lin", Supplier=Digikey, Supplier 1=Mouser, Wattage=1/10W
R19: library part RESISTOR_33K_0805, "RES 33k OHM 5% 1/8W 0805", Digikey Part Numer=CR0603-JW-104ELFTR-ND, Supplier Part Number 1=65T8819, Tolerance="+/- 5%", Value  (Ohms)=33K, ComponentLink1Description=Datasheet, ComponentLink1URL=https://www.bourns.com/docs/product-datasheets/CRxxxxx.pdf, Made By="Dylan Trainor", Supplier=Digikey, Supplier 1=Newark, Wattage=1/8W
R20: library part RESISTOR_169K_1%_0603, "169 kOhms ±1% 0.333W, 1/3W Chip Resistor 0603 (1608 Metric) Automotive AEC-Q200, Pulse Withstanding Thick Film", Digikey Part Numer=CR0603-JW-104ELFTR-ND, Supplier Part Number 1=CRCW0603169KFKEAHP-ND, Tolerance="+/- 1%", Value  (Ohms)=169K, ComponentLink1Description=Datasheet, ComponentLink1URL=https://www.bourns.com/docs/product-datasheets/CRxxxxx.pdf, Made By="Andrew Lin", Supplier=Digikey, Supplier 1=Digi-Key, Wattage=1/10W
R21 R22 R23 R24: library part RESISTOR_10K_0603, "RES 10k OHM 5% 1/10W 0603", Digikey Part Numer=CR0603-JW-104ELFTR-ND, Supplier Part Number 1=2019-RK73B1JTTD103JCT-ND, Tolerance="+/- 5%", Value  (Ohms)=10K, ComponentLink1Description=Datasheet, ComponentLink1URL=https://www.bourns.com/docs/product-datasheets/CRxxxxx.pdf, Made By="Robert Pafford", Supplier=Digikey, Supplier 1=Digi-Key, Wattage=1/8W
R25 R26: library part RESISTOR_2.2K_0402_1, "RES 2.2K OHM 1% 1/16W 0402", Supplier Part Number 1=9737263, Tolerance="+/- 1%", Value  (Ohms)=2.2K, Made By="Megan McCabe", Supplier 1="Future Electronics", Wattage=1/16W
R27: library part RESISTOR_10K_0402, "RES 10k OHM 1% 1/16W 0402", Digikey Part Numer=CR0603-JW-104ELFTR-ND, Supplier Part Number 1=YAG3436CT-ND, Tolerance="+/- 1%", Value  (Ohms)=10K, Made By="Robert Pafford", Supplier=Digikey, Supplier 1=Digi-Key, Wattage=1/16W
U1 U2 U3 U4: "N-Channel 30 V 30A 24W Surface Mount 8-DFN (3.15x3.05)", Mfr_Name="Goford Semiconductor", Supplier Part Number 1=3141-G30N03D3CT-ND, VALUE_2=Value, Copyright="Copyright (C) 2023 Ultra Librarian. All rights reserved.", Manufacturer_Part_Number=G30N03D3, RefDes=RefDes, Supplier 1=Digi-Key, Type=DEV
U5: library part BQ25731RSNR, "I2C 1-5 cell NVDC buck-boost battery charge controller with USB type-C PD support", Max Charge Current=10A, Max Input Voltage=26V, Made By="Andrew Lin", Max Number Cells=5
U6: library part CMP-1109-00085-1, "Low Drop Linear Voltage Regulator, 4.7 to 40 V Supply, 3.3 V Output, -40 to 150 degC, PG-SOT223 (SC-73), Reel, Green", Dropout Voltage="250 mV", Manufacturer=Infineon, Max. Output Current="400 mA", Operating Range="4.7 to 40 V", Output Voltage="3.3 V", Typical Quiescent Current="100 uA", Accuracy="2 %", ComponentLink1Description="Manufacturer URL", ComponentLink1URL=http://www.infineon.com/, ComponentLink2Description=Datasheet, ComponentLink2URL=http://www.infineon.com/dgdl/TLE42744_DS_11.pdf?folderId=db3a304318f3fe290118f5a433570040&fileId=db3a304327b897500128012ccafe37d2&location=en.Products.Automotive_ICs.Linear_Voltage_Regulators_for_Automotive-Applications.Linear_Voltage_Regulators_-_Selectio, ComponentLink3Description="Package Specification", ComponentLink3URL=http://www.infineon.com/dgdl/SOT223-Package_Overview.pdf?folderId=db3a30431936bc4b0119530470b03c3d&fileId=db3a30431936bc4b0119531d40b93c5c, DatasheetVersion="Rev. 1.1", Green=TRUE, Mounting Technology="Surface Mount", PackageDescription="4-Pin Small Outline Transistor Package, 6.5 x 3.5 mm Body, 2.3 mm Pitch", PackageReference="PG-SOT223 (SC-73)", PackageVersion=Apr-08, Packing=Reel, PartNumber="TLE42744GS V33", Regulator Type="single output"
U7: "Audio Amplifiers Digital Input Class D Amplifier", Mfr_Name="Analog Devices Inc", Made By="Andrew Lin", RefDes=RefDes, Supplier 1="Arrow Electronics", Supplier Part Number 1=MAX98357AETE+T
U8: "USB, Type-C Controller PMIC 38-WQFN (4x6)", Mfr_Name="Texas Instruments", Copyright="Copyright (C) 2023 Ultra Librarian. All rights reserved.", Made By="Andrew Lin", Manufacturer_Part_Number=TPS25750DRJKR, RefDes=RefDes, Type=DEV

## Free pads (board coordinates)
  round 60 hole 165: 1(170,255) 1(170,3755) 1(7770,255) 1(7770,3755)

## Via types
v1: diameter 19.68, hole 7.87, Top Layer to Bottom Layer, 4 vias

## Nets (pads, with @x,y where several pads share a name; then routed paths per layer and width w, separated by ;. In a path a pad name is that pad's centre, name@x,y a point inside that pad or via, vN(x,y) a via of type N, cw(c..) or ccw(c..) an arc to the next point about the centre after c; other vN are vias at no path point)
3V3: C38.1 C56.1 C58.1 R17.1 R21.1 R22.1 R23.1 R24.1 R25.2 R26.2 R27.2 U6.3 U7.4 U7.7 U7.8 U8.1 U8.38
ACN: C29.1 R7.2 U5.2
ACP: C28.1 R6.2 U5.3
AUDIOIN: U7.1
BATT: C8.1 C9.1 C26.1 R4.1 R9.1
BCLK: U7.16
BTST1: U5.30
BTST2: U5.25
CC1: C52.1 U8.28
CC2: C51.1 U8.29
CHRG_OK: R21.2 U5.4
CMPOUT: R22.2 U5.15
Dn1: U8.27
Dp1: U8.26
GND: C1.2 C2.1 C3.1 C4.2 C5.2 C6.2 C7.2 C8.2 C9.2 C10.1 C11.1 C12.2 C13.2 C14.2 C15.2 C16.2 C17.2 C18.2 C19.2 C20.2 C21.2 C22.2 C23.2 C24.2 C25.2 C27.2 C28.2 C29.2 C30.1 C35.2 C36.1 C37.2 C38.2 C39.2 C40.2 C41.2 C42.2 C43.2 C44.2 C45.2 C46.2 C47.2 C48.2 C49.2 C50.2 C51.2 C52.2 C53.2 C54.2 C55.2 C56.2 C57.2 C58.2 D1.1 R10.1 R16.2 R18.2 R19.2 R20.2 U3.5 U3.6 U3.7 U3.8 U3.9 U4.1 U4.2 U4.3 U5.27 U6.2 U6.4 U7.2 U7.3 U7.11 U7.15 U7.17 U8.5 U8.6 U8.7 U8.11 U8.12 U8.13 U8.14 U8.16 U8.17 U8.18 U8.19 U8.31 U8.36 U8.37 U8.39
HIDRV1: U1.4 U5.31
HIDRV2: U2.4 U5.24
ILIM_HIZ: R15.2 R16.1 U5.6
LODRV1: U4.4 U5.29
LODRV2: U3.4 U5.26
LRCLK: U7.14
NetC1_1: C1.1 C5.1 R3.1 R7.1 U1.5 U1.6 U1.7 U1.8 U1.9
NetC6_1: C6.1 R1.1
NetC27_1: C27.1 R5.1
NetC31_1: C31.1 R11.1 U5.17
NetC31_2: C31.2 C32.2
NetC32_1: C32.1 R11.2
NetC33_1: C33.1 R14.2
NetC33_2: C33.2 C34.2
NetC34_1: C34.1 R14.1 U5.16
NetC40_1: C40.1 U5.9
NetC41_1: C41.1 R20.1 U5.8
NetC47_1: C47.1 C48.1 C49.1 C50.1 U8.34 U8.35
NetC53_1: C53.1 C54.1 C55.1 U8.20 U8.21 U8.22
NetC57_1: C57.1 U8.4
NetCR1_1: CR1.1 R2.2
NetCR1_2: CR1.2 R1.2
NetL2_1: L2.1 U7.10
NetL2_2: L2.2 U7.9
NetR10_2: R10.2 R12.1 U5.18
NetR17_2: R17.2 R18.1 U5.14
NetR19_1: R19.1 U5.10
NetR27_1: R27.1 U8.10
NetU8_2: U8.2
NetU8_3: U8.3
OTG/VAP: U5.5
PROCHOT: U5.11
REGN: C36.2 R13.1 U5.28
SCL: R23.2 R25.1 U5.13 U8.9
SDA: R24.2 R26.1 U5.12 U8.8
SRN: R9.2 U5.19
SRP: R8.2 U5.20
SW1: C10.2 L1.2 U1.1 U1.2 U1.3 U4.5 U4.6 U4.7 U4.8 U4.9 U5.32
SW2: C11.2 L1.1 U2.5 U2.6 U2.7 U2.8 U2.9 U3.1 U3.2 U3.3 U5.23
V+: C37.1 C39.1 D1.2 U6.1
VBUS: C4.1 C12.1 C13.1 C14.1 C15.1 C16.1 C17.1 C42.1 C43.1 C44.1 C45.1 C46.1 R2.1 R3.2 R5.2 R6.1 U5.1 U8.23 U8.24 U8.25 U8.32 U8.33
VDDA: C35.1 R12.2 R13.2 R15.1 U5.7
VSYS: C2.2 C3.2 C7.1 C18.1 C19.1 C20.1 C21.1 C22.1 C23.1 C24.1 C25.1 C26.2 C30.2 R4.2 R8.1 U2.1 U2.2 U2.3 U5.22
pads on no net: U5.21 U5.33 U7.5 U7.6 U7.12 U7.13 U8.15 U8.30 U8.40 U8.41 U8.42 U8.43 U8.44 U8.45 U8.46 U8.47 U8.48 U8.49 U8.50 U8.51 U8.52 U8.53 U8.54 U8.55 U8.56 U8.57 U8.58 U8.59 U8.60 U8.61 U8.62 U8.63 U8.64
copper on no net:
  other v1: 7519.13,1391.97 7562.44,1391.97 7519.13,1435.28 7562.44,1435.28

## Keep-outs
Keep-Out Layer:
  lines w10: 3750,0 250,0 ; 8100,250 cw(c7850,250) 7850,0 250,0 ; 8100,3750 ccw(c7850,3750) 7850,4000 250,4000 ccw(c250,3750) 0,3750 0,250 ccw(c250,250) 250,0 ; 25760,-2120 25760,1380

## Silkscreen, mask and mechanical layers (free items; w line width, h text height)
Top Overlay:
  drawing of 19 lines, arcs and shapes, not listed
  text "The Underwater Robotics Team" at 1405,265 h60
  text "'.ProjectTitle'" at 1405,159.99 h60

## Text inside footprints (layer, text, board x,y; h text height)
U7: Top Overlay "*" at 842.5,1664.37 h50; Top 3D Body "*" at 899.5,1664.37 h50
U8: Top Overlay "Designator565" at 7935,395 h50 r90